# Altium PCB LightSensors_PCB.PcbDoc
Units mm, origin at the board's own origin, x right, y up, seen from the top; angles counter-clockwise.
Board outline 50.29 x 30.25 mm, 2 copper layers (Top Layer, Bottom Layer); 13 components, 6 nets, 30 pads, 0 vias.
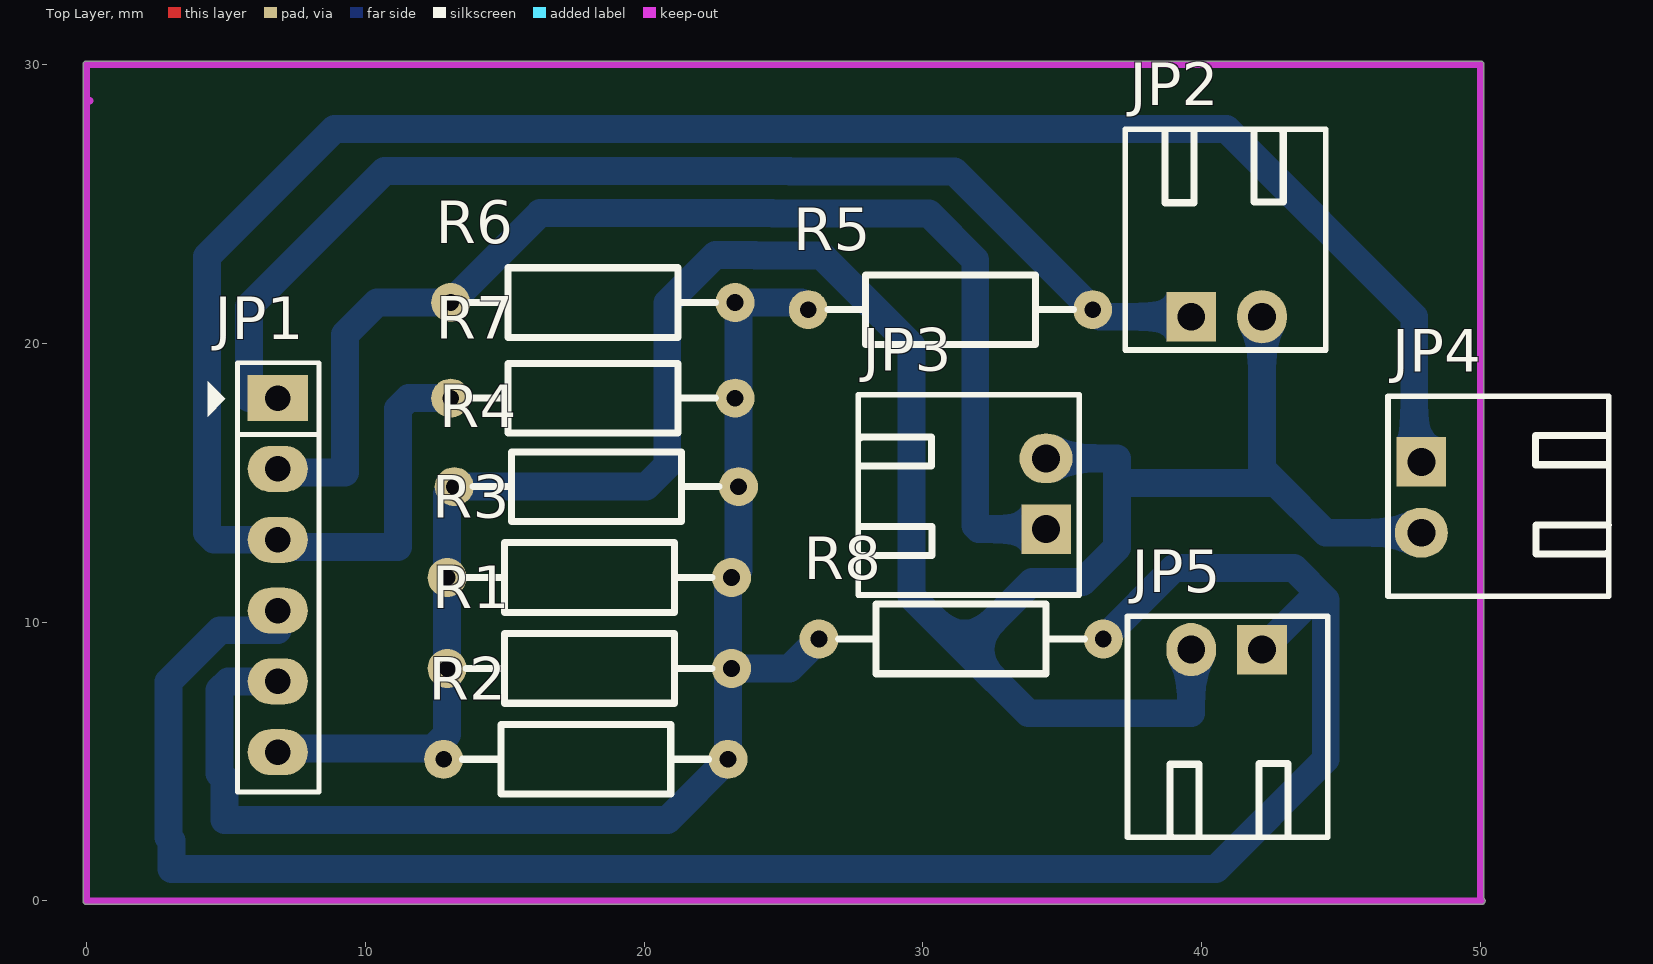
[diagram p0: Top Layer view]
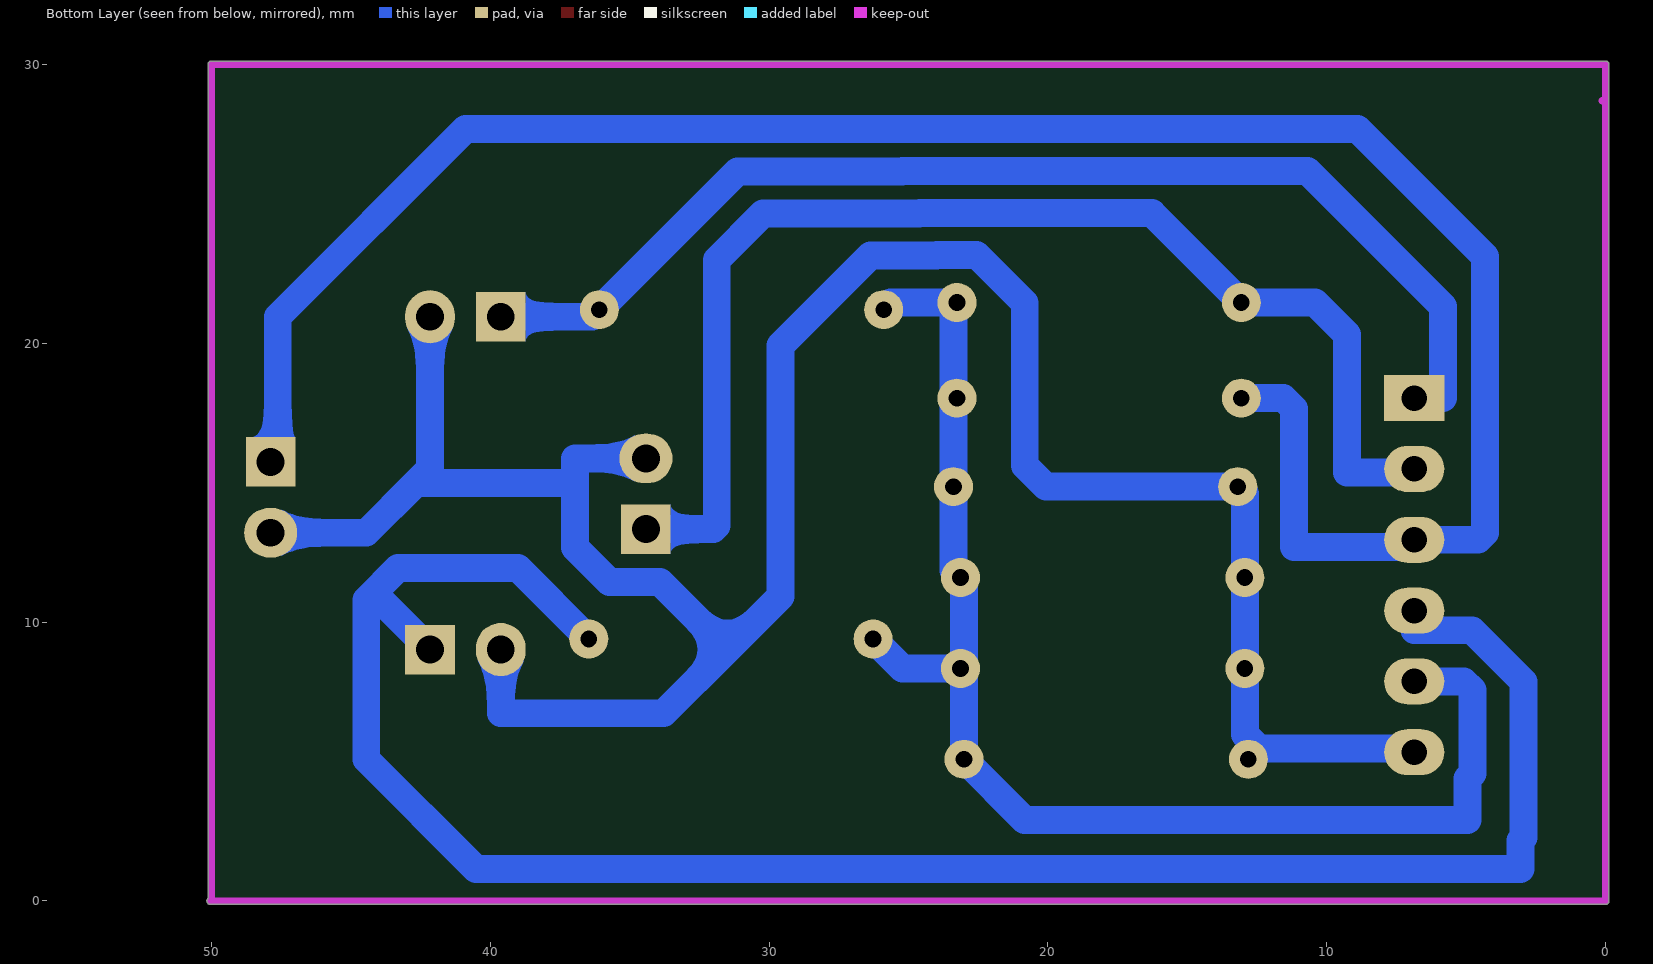
[diagram p1: Bottom Layer view, seen from below]
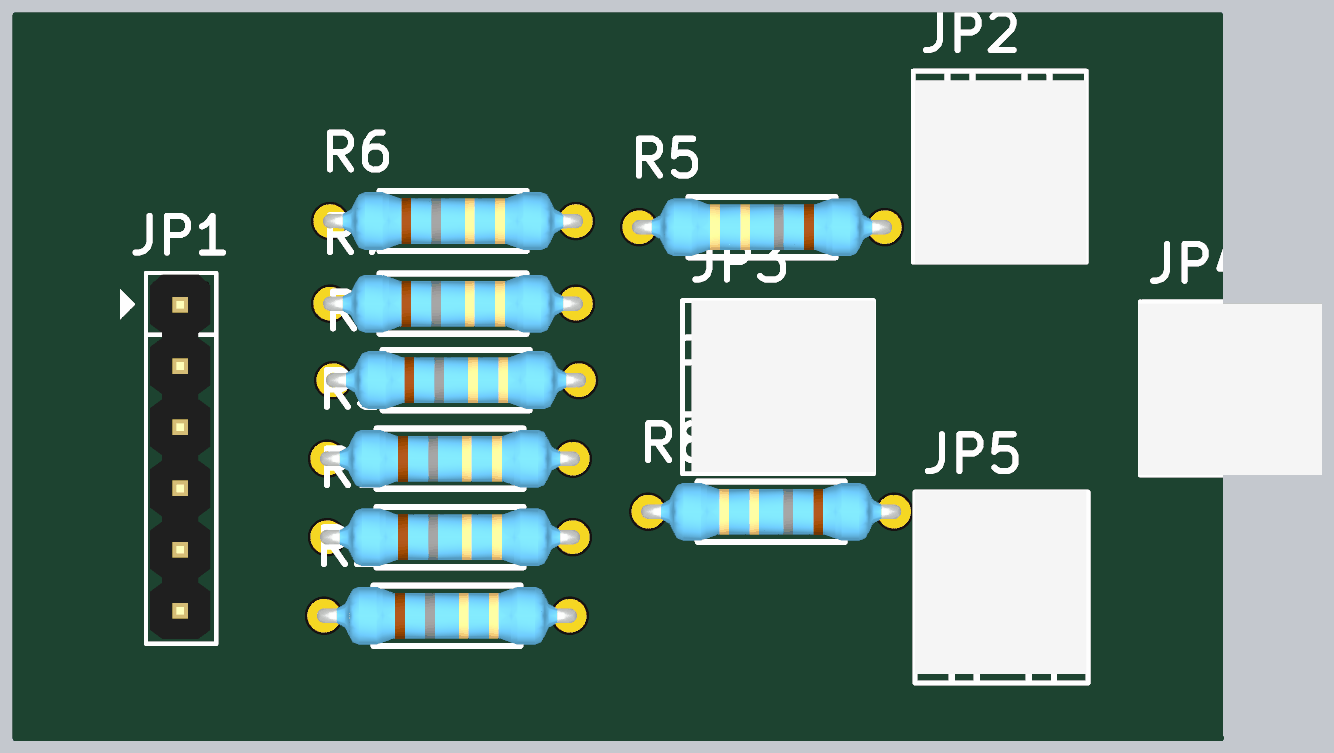
[diagram p2: 3D render of the assembled board from above, using the file's embedded part models]

## Layer stack, top to bottom
Top Solder: solder mask 0.0102, Solder Resist, Dk 3.5
Top Layer: signal copper 0.0356
Dielectric 1: dielectric 0.32, FR-4, Dk 4.8
Bottom Layer: signal copper 0.0356
Bottom Solder: solder mask 0.0102, Solder Resist, Dk 3.5

## Board outline
-0.127,0 ccw(c0,0) 0,-0.127 50.038,-0.127 ccw(c50.038,0) 50.165,0 ccw(c50.038,0) 50.127,0.091 50.127,30 ccw(c50,30) 50,30.127 0,30.127 ccw(c0,30) -0.127,30

## Design rules (kind name [scope] priority, off if disabled: settings)
Clearance [All] p1: gap=0.508
PolygonConnect [All] p1: connectstyle=Relief reliefconductorwidth=0.254 reliefentries=4 polygonreliefangle="90 Angle" airgapwidth=0.254
RoutingVias [All] p1: holewidth=0.711 width=2.54 viastyle="Through Hole" minholewidth=0.711 minwidth=1.67 maxholewidth=0.711 maxwidth=2.54
SolderMaskExpansion [All] p1: expansion=0.102
Width [All] p1: maxlimit=1.5 minlimit=0.8 preferedwidth=1
30 further rules are at their usual default settings.

## Components (designator, comment, footprint, x,y, rotation, side; value= is the part's Value field where it differs from the comment)
JP1 "2.54_6P" JP6 6.858,18.034 r270 top
JP2 "Header 1_2.54_2P" "Header_Duc Cong_2P 2.54" 39.624,20.955 r180 top
JP3 "Header 1_2.54_2P" "Header_Duc Cong_2P 2.54" 34.417,13.335 r270 top
JP4 "Header 1_2.54_2P" "Header_Duc Cong_2P 2.54" 47.879,15.748 r90 top
JP5 "Header 1_2.54_2P" "Header_Duc Cong_2P 2.54" 42.164,9.017 r0 top
R1 "1k" "tro vach 1/4w" 18.034,8.34 r180 top
R2 "1k" "tro vach 1/4w" 17.907,5.08 r180 top
R3 "1k" "tro vach 1/4w" 18.034,11.599 r180 top
R4 "1k" "tro vach 1/4w" 18.288,14.859 r180 top
R5 "10k" "tro vach 1/4w" 30.988,21.209 r0 top
R6 "10k" "tro vach 1/4w" 18.161,21.463 r180 top
R7 "10k" "tro vach 1/4w" 18.161,18.034 r180 top
R8 "10k" "tro vach 1/4w" 31.369,9.398 r0 top

## Footprints (in the part's own frame and the unit in brackets; to place one, negate y for a bottom-side part, rotate by r counter-clockwise, add the part's x,y. Pads: shape width x height; smd on the part's side, far side on the other; paste and mask are expansions set on the pad)
"Header_Duc Cong_2P 2.54" [mil]
  rect 70x70 hole 39.37 unplated: 1(0,0)
  oval 70x75 hole 39.37 unplated: 2(-100,0)
  silkscreen extent -190,-265 93,47, body extent -190,-250 90,50, height 237
JP6 [mil] "JP6"
  rect 65x85 hole 36: 1(0,0)
  oval 65x85 hole 36: 2(100,0) 3(200,0) 4(300,0) 5(400,0) 6(500,0)
  silkscreen extent -50,-99 556,58, body extent -48,-50 548,48, height 323
"tro vach 1/4w" [mm]
  round 1.4 hole 0.6: 1(-5.1,0) 2(5.1,0)
  silkscreen extent -4.39,-1.25 4.42,1.25, body extent -5.38,-1.2 5.38,1.2, height 2.41

## Part data
JP1: library part "Jum Don Duc 2.54_6P", "C?m"
JP2 JP3 JP4 JP5: "C?m"
R1 R2 R3 R4: library part "Tro Vach 1/4W 5% 1k", "C?m"
R5 R6 R7 R8: library part "Tro Vach 1/4W 5% 10k", "Cam"

## Nets (pads, with @x,y where several pads share a name; then routed paths per layer and width w, separated by ;. In a path a pad name is that pad's centre, name@x,y a point inside that pad or via, vN(x,y) a via of type N, cw(c..) or ccw(c..) an arc to the next point about the centre after c; other vN are vias at no path point)
3.3V: JP1.6 JP2.2 JP3.2 JP4.2 JP5.2 R1.2 R2.2 R3.2 R4.2 | length 97.6
  Bottom Layer w1: 11.557,5.461 6.985,5.461 12.426,5.461 12.934,5.969 R1.2 R3.2 R4.2@12.934,14.605 ; R4.2 20.066,14.859 20.828,15.621 20.828,21.445 22.554,23.171 23.968,23.171 23.993,23.146 26.366,23.146 29.591,19.921 29.591,10.922 31.496,9.017 ; JP3.2 36.957,15.875 36.957,14.986 ; JP5.2 39.624,6.731 33.782,6.731 31.496,9.017 ; JP2.2 42.164,15.494 42.672,14.986 ; JP4.2 44.45,13.208 42.672,14.986 ; 31.496,9.017 33.917,11.438 35.724,11.438 36.957,12.671 36.957,14.986 ; 36.957,14.986 42.672,14.986
ADC1: JP1.1 JP2.1 R5.2 | length 42.3
  Bottom Layer w1: JP1.1 5.826,18.034 5.826,21.32 10.684,26.178 21.295,26.178 21.304,26.187 25.218,26.187 25.243,26.162 31.135,26.162 R5.2 36.342,20.955 JP2.1
ADC2: JP1.2 JP3.1 R6.2 | length 44.5
  Bottom Layer w1: JP1.2@6.985,15.367 9.271,15.367 9.271,20.32 10.414,21.463 R6.2 16.268,24.67 21.92,24.67 21.929,24.679 24.593,24.679 24.618,24.654 30.216,24.654 31.877,22.993 31.877,13.462 32.004,13.335 JP3.1
ADC3: JP1.3 JP4.1 R7.2 | length 76.9
  Bottom Layer w1: R7.2 11.557,18.034 11.176,17.653 11.176,12.7 7.112,12.7 JP1.3 4.572,12.954 4.318,13.208 4.318,23.114 8.89,27.686 20.671,27.686 20.68,27.695 40.885,27.695 47.625,20.955 JP4.1@47.625,16.002
ADC4: JP1.4 JP5.1 R8.2 | length 73.1
  Bottom Layer w1: JP1.4 6.858,9.708 4.781,9.708 2.937,7.864 2.937,2.28 3.048,2.169 3.048,1.143 40.513,1.143 44.45,5.08 44.45,10.795 43.307,11.938 39.009,11.938 R8.2 ; JP5.1 44.069,10.922
GND: JP1.5 R1.1 R2.1 R3.1 R4.1 R5.1 R6.1 R7.1 R8.1 | length 48.3
  Bottom Layer w1: JP1.5 5.08,7.874 4.77,7.564 4.77,4.575 4.953,4.392 4.953,2.905 20.832,2.905 R2.1 23.007,11.472 R3.1 23.388,11.853 R4.1 R6.1@23.388,21.336 ; R1.1 25.211,8.34 R8.1 ; R6.1 R5.1@25.634,21.463

## Keep-outs
Keep-Out Layer:
  lines w0.254: 0,28.702 0.127,28.702 ; 50,0 50,30 0,30 0,0 50.038,0